# Altium PCB RT_SUPER_C.PCBdoc (part 3 of 3)
Units mil, origin at the board's own origin, x right, y up, seen from the top; angles counter-clockwise.
Board outline 1181.1 x 1181.1 mil, 4 copper layers (Top Layer, GND, PWR, Bottom Layer), stack 39.556 mil thick; 97 components, 119 nets, 508 pads, 144 vias.
Unrouted connection lines stored in the file: 163.
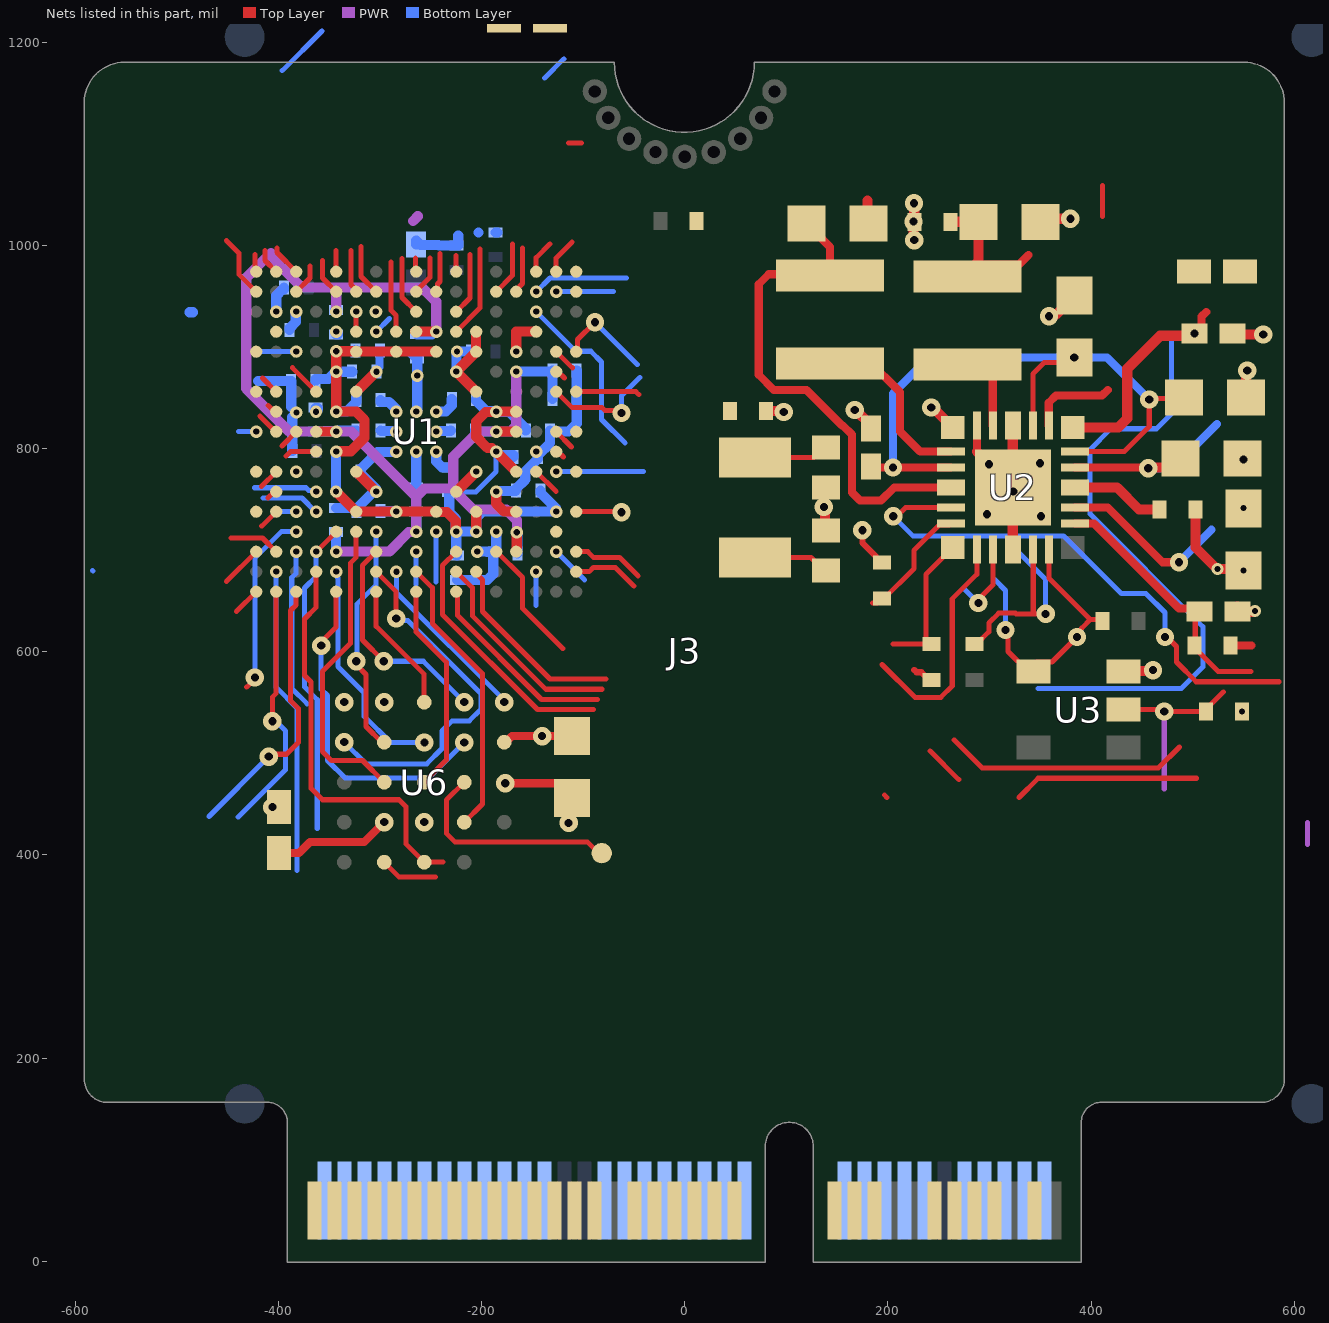
[diagram p4: the nets of this part, all layers, seen from the top]

## Via types
v1: diameter 12, hole 6, Top Layer to Bottom Layer, tented both sides, 83 vias
v2: diameter 18, hole 8, Top Layer to Bottom Layer, tented both sides, 61 vias

## Nets (pads, with @x,y where several pads share a name; then routed paths per layer and width w, separated by ;. In a path a pad name is that pad's centre, name@x,y a point inside that pad or via, vN(x,y) a via of type N, cw(c..) or ccw(c..) an arc to the next point about the centre after c; other vN are vias at no path point) (continued)
+3v3: C12.2 C13.2 C14.2 C15.2 C16.2 C17.2 C18.2 C20.2 C21.2 C22.2 C23.2 C24.2 C25.2 C42.1 C43.1 C?.1@793.44,405.6 C?.2@680.44,329.51 J1.1 J2.1 R3.2 R4.2 R8.2 R9.2 R12.2 R13.2 R14.2 R22.2 U1.E6 U1.E8 U1.E10 U1.F5 U1.H5 U1.H13 U1.H14 U1.K5 U1.K13 U1.L14 U1.M5 U1.N6 U1.N8 U1.N10 U1.N12 U1.N16 U1.P11 U1.P12 U6.B4 U6.D1 U6.E4 U?.8 | length 1373.8
  Top Layer w6: v2(174.91,719.45) 174.91,707.12 188.46,693.57 188.46,691.61 192.35,687.72 R3.2@194.31,687.72 ; 226,582 228.3,579.7 233.09,579.7 240.78,572.01 R4.2@242.74,572.01 ; R9.2@1063,261.72 1080.44,261.72 v2(1082.72,264)
  Top Layer w8: C43.1@-399.22,401.68 -379.75,401.68 -368.89,412.54 -315.35,412.54 v2(-295.72,432.17) ; U6.D1@-177.61,510.91 -175.83,510.91 -169.9,516.83 v2(-140.29,516.83) C42.1@-110.68,516.83
  Top Layer w10: v1(-343.22,757.54) -343.02,757.54 U1.M5@-342.96,757.48 U1.N6@-323.28,737.8 v1(-283.91,737.8) U1.N10@-244.54,737.8 -244.15,737.41 -234.1,737.41 -225.23,728.55 -225.23,718.5 v1(-224.85,718.11) ; v1(-342.96,796.85) -342.58,797.24 -328.52,797.24 -315.22,810.54 -315.22,828.17 -323.28,836.22 v1(-342.96,836.22) v1(-342.96,875.59) v1(-342.96,895.66) -323.66,895.66 U1.E6@-323.28,895.28 U1.E8@-283.91,895.28 U1.E10@-244.54,895.28 ; v1(-205.17,718.11) U1.N12@-205.17,737.8 ; U1.K13@-189.71,800.54 -194.17,800.54 -205.17,811.54 -205.17,826.59 -195.92,835.84 -185.86,835.84 v1(-185.48,836.22) U1.H14@-165.8,836.22 ; v1(-185.48,796.85) U1.L14@-165.8,777.17 ; R22.2@502.72,740 502.72,702.59 523.99,681.33 v1(524.45,681.33) ; v1@528.78,681.33 548.69,681.33 v1(550,680.02)
  Bottom Layer w5: C15.2@-231.74,757.29 -205.47,757.29 -185.48,777.28 v1(-185.48,796.85)
  Bottom Layer w10: C16.2@-363.22,866.54 -363.22,868.35 -363.14,868.43 -350.67,868.43 -343.5,875.59 v1(-342.96,875.59) ; v1(-343.22,757.54) C20.2@-343.22,777.54 -343.14,777.62 -343.14,796.67 v1(-342.96,796.85) ; v1(-342.96,836.22) -342.58,836.61 -332.34,836.61 -323.22,845.73 C21.2@-323.22,847.54 -323.22,849.35 C21.2@-323.3,849.43 ; v1(-342.96,895.66) -342.58,896.04 -323.81,896.04 -323.73,896.12 C17.2@-323.73,896.66 ; v1(-342.96,875.59) C13.2@-327.22,875.54 ; C24.2@-299.22,738.54 -299.22,738.25 -299.14,738.17 -284.28,738.17 v1(-283.91,737.8) ; C15.2@-231.74,757.29 -231.74,737.21 -225.23,730.71 -225.23,718.5 v1(-224.85,718.11) ; C12.2@-224.22,694.54 -224.85,695.17 v1(-224.85,718.11) ; C22.2@-205.22,848.54 -205.22,846.73 -195.1,836.61 -185.86,836.61 v1(-185.48,836.22) -185.1,835.84 -172.83,835.84 -156.34,819.35 C25.2@-156.34,817.54 ; v1(-185.48,796.85) -184.94,796.85 -181.51,793.43 -168.42,793.43 -168.34,793.35 C23.2@-168.34,791.54 ; C14.2@-141.98,758.47 -141.98,756.66 -126.81,741.48 -126.81,738.18 v1(-126.43,737.8) -199.31,737.8 -204.78,732.32 -204.78,718.5 v1(-205.17,718.11) v1(-224.85,718.11)
  other v1: 548.38,541.05
  other v2: -295.72,550.28
+5vUSB: D2.1 J3.19 U1.R16 U4.4 | length 225.2
  Top Layer w5: 196.5,459.04 199,456.54 ; 329.17,456.54 348.06,475.44 503.5,475.44
  Bottom Layer w5: v1(-126.43,698.43) -126.25,698.43 -98.46,670.64
+VBATT: C4.2 R6.2 U2.18 | length 235.7
  Top Layer w8: v2(501.78,913.11) 504.73,913.11 508.69,917.07 508.69,929.81 513.37,934.49 ; R6.2@537.04,606.01 557.97,606.01
  Top Layer w10: U2.18@382.03,820.67 426.89,820.67 435.66,829.43 435.66,878.58 468.07,910.99 499.65,910.99 v2(501.78,913.11)
+VBATT_BU: C3.2 R6.1 U2.13 | length 254
  Top Layer w5: C3.2@502.59,637.87 502.59,606.99 R6.1@501.6,606.01 501.6,604.04 525.22,580.42 557.56,580.42
  Top Layer w8: U2.13@384,726.18 402.9,726.18 486.41,642.66 497.73,642.66 499.84,640.55 C3.2@499.84,637.87
+VIN: D1.1 J3.2
+VREF: C6.2 J3.16 R21.2 U1.D2
ADC0_1: J3.22 U1.E3 | length 95.2
  Bottom Layer w5: -422.19,895.43 v1(-382.33,895.43) ; -396.17,1171.83 -357,1211
ADC0_3: U1.A2 | length 25.5
  Top Layer w5: -413.04,994.9 -413.04,985.04 U1.A2@-402.02,974.02
ADC0_4: U1.B5 | length 36.4
  Top Layer w5: -356.46,985.16 -356.46,967.83 U1.B5@-342.96,954.33
ADC0_8: J3.20 U1.E1 | length 1.9
  Top Layer w5: U1.E1@-423.04,896.62 U1.E1@-421.7,895.28
ADC0_12: J3.18 U1.B1 | length 62.5
  Top Layer w5: -451.06,1004.64 -438.81,992.39 -438.81,971.44 U1.B1@-421.7,954.33
DM_MCU: J3.21 U1.T17 U4.2 | length 66.2
  Top Layer w5: U1.T17@-106.74,678.74 -94,678.74 -89.85,682.88 -68.29,682.88 -49.87,664.47
DP_MCU: J3.23 U1.R17 U4.3 | length 70.9
  Top Layer w5: U1.R17@-106.74,698.43 -95.4,698.43 -89.85,692.88 -64.15,692.88 -45.73,674.47
FC0_CLK: J3.32 U1.G1
FC0_RXD: J3.36 U1.G4 | length 33.2
  Top Layer w5: -386.15,879.41 U1.G4@-362.65,855.91
FC0_SSEL0: J3.38 U1.H2 | length 10.6
  Top Layer w5: -410.1,842.41 -403.91,836.22 U1.H2@-402.02,836.22
FC0_SSEL1: U1.J1 | length 17.5
  Bottom Layer w5: -439.22,816.54 v1(-421.7,816.54)
FC0_TXD: J3.34 U1.G2 | length 19.1
  Top Layer w5: -415.52,869.41 U1.G2@-402.02,855.91
FC1_CLK: J3.40 U1.J2 | length 22.2
  Top Layer w5: -417.88,831.81 -402.61,816.54 U1.J2@-402.02,816.54
FC1_DAT: J3.44 U1.L3 | length 0.7
  Bottom Layer w5: -583,680 -582.52,679.52
  other v1: -382.33,777.17
FC1_SSEL0: J3.46 U1.J3 | length 19.8
  Top Layer w5: -396.33,802.54 U1.J3@-382.33,816.54
FC1_SSEL1: U1.L1
FC1_TXD: J3.42 U1.K4 | length 31.3
  Top Layer w5: -392.19,792.54 -387.87,796.85 U1.K4@-362.65,796.85
FC2_CLK: J3.70 U1.A3 | length 31.1
  Top Layer w5: -401.24,997.24 -401.24,992.93 U1.A3@-382.33,974.02
FC2_SDA: J3.74 U1.D6 | length 48.2
  Top Layer w5: U1.D6@-323.28,914.96 v1(-323.28,934.65)
  Bottom Layer w5: -137.94,1164.49 -118.96,1183.48 ; 490.84,1353.84 492,1355
FC2_SSEL0: U1.D7 | length 18.4
  Bottom Layer w5: v1(-303.59,914.96) -290.56,928
FC2_SSEL1: U1.B7 | length 50.7
  Top Layer w5: -318.52,998.83 -318.52,969.27 U1.B7@-303.59,954.33
FC2_WS: J3.72 U1.A5 | length 21
  Top Layer w5: U1.A5@-342.96,974.02 -342.96,994.98
FC3_CLK: U1.C7 | length 11.9
  Bottom Layer w5: v1(-304.06,934.65) v1@-303.59,935.11 ; -165.95,1247.05 -158,1255
FC3_SDA: J3.68 U1.C9 | length 58
  Top Layer w5: -278.22,986.81 -278.22,948.65 U1.C9@-264.22,934.65
FC3_SSEL0: U1.B9 | length 38.9
  Top Layer w5: U1.B9@-264.22,954.33 -264.22,954.93 -250.72,968.43 -250.72,987.59
FC3_SSEL1: U1.A9 | length 13.7
  Top Layer w5: -264.79,987.52 -264.79,974.58 U1.A9@-264.22,974.02
FC3_WS: U1.D8 | length 70.3
  Top Layer w5: -288.83,983.27 -288.83,935.68 -283.91,930.76 U1.D8@-283.91,914.96
FC4_CLK: J3.60 U1.D11 | length 93.3
  Top Layer w5: U1.D11@-224.85,914.96 -201.35,938.46 -201.35,996.17
  PWR w5: 239.6,1255 242,1255
FC4_SDA: J3.64 U1.C11 | length 61.6
  Top Layer w5: U1.C11@-224.85,934.65 -211.35,948.15 -211.35,990.65
FC4_SSEL0: U1.A11 | length 16
  Top Layer w5: U1.A11@-224.85,974.02 -224.85,990.01
FC4_SSEL1: U1.E17 | length 730.4
  Top Layer w5: U1.E17@-106.74,895.28 -105.4,896.62 -105.4,907.14 v2(-88.29,924.25) ; 411.27,1028.13 411.27,1058.91
  Bottom Layer w5: v2(-88.29,924.25) -46.64,882.6 ; 347.7,563.92 488.93,563.92 510.01,585 510.01,624.57 399.17,735.41 399.17,799.06 419.49,819.39 464.39,819.39 479,834 479,912.81
FC4_WS: J3.62 U1.B10 | length 39
  Top Layer w5: U1.B10@-244.54,954.33 -243.2,955.67 -243.2,961.81 -240.72,964.28 -240.72,991.74
FC5_SCK: J3.52 U1.G16 | length 115.4
  Top Layer w5: U1.G16@-126.43,855.91 -110.68,840.16 -81.22,840.16 -78.54,837.48 -64.71,837.48 v2(-62.22,835)
  Bottom Layer w5: v2(-62.22,835) -62.1,835.12 -62.1,851.9 -44.02,869.98
FC5_SDA: J3.56 J3.66 U1.J16 | length 21.2
  Top Layer w5: U1.J16@-126.43,816.54 -111.43,801.54
FC5_SSEL0: J3.58 U1.J17
FC5_WS: J3.54 U1.G17 | length 62.9
  Top Layer w5: U1.G17@-106.74,855.91 -48.11,855.91 -45.11,852.91
FLEXSPI0A_D0: U1.T5 U6.D3 U?.5 | length 224
  Top Layer w5: U6.D3@-256.35,510.91 -256.35,510.66 v2(-256.22,510.54)
  Bottom Layer w5: v1(-342.96,678.74) -341.62,677.4 -341.62,672.71 -341.22,672.31 -341.22,585.21 -315.36,559.34 -315.36,536.47 -289.42,510.54 v2(-256.22,510.54)
FLEXSPI0A_D1: U1.U5 U6.D2 U?.2 | length 331.5
  Top Layer w5: v2(-357.72,605.91) -357.72,609.43 -342.96,624.19 U1.U5@-342.96,659.06 ; v2(-216.98,510.54) U6.D2@-216.98,510.91
  Bottom Layer w5: v2(-357.72,605.91) -357.72,563.03 -351.59,556.89 -351.59,492.95 -334.18,475.54 -251.98,475.54 v2(-216.98,510.54)
FLEXSPI0A_D2: U1.P6 U6.C4 U?.3 | length 303.5
  Top Layer w5: U1.P6@-323.28,718.11 -323.28,692.88 -329.02,687.14 -329.02,608.07 -356.46,580.63 -356.46,501.57 -347.77,492.89 -317.06,492.89 U6.C4@-295.72,471.54
FLEXSPI0A_D3: U1.P7 U6.D4 U?.7 | length 228.2
  Top Layer w5: v2(-323.22,590.54) -323.22,587.02 -313.66,577.46 -313.66,526.41 -298.16,510.91 U6.D4@-295.72,510.91
  Bottom Layer w5: v2(-323.22,590.54) -322.65,591.11 -322.65,646.72 -303.59,665.78 v1(-303.59,718.11)
FLEXSPI0A_D4: U1.T7 U6.D5 | length 359.4
  Top Layer w5: U1.T7@-303.59,678.74 -283.91,659.06 v2(-283.91,632.54)
  Bottom Layer w5: v2(-335.09,510.91) -313.73,489.55 -253.87,489.55 -238.84,504.58 -238.84,521.86 -228.74,531.96 -211.96,531.96 -200.48,543.44 -200.48,558.55 -272.52,630.59 -281.96,630.59 v2(-283.91,632.54)
FLEXSPI0A_D5: U1.U7 U6.E3 | length 128.3
  Top Layer w5: U1.U7@-303.59,659.06 -303.59,625.01 -256.35,577.77 U6.E3@-256.35,550.28
FLEXSPI0A_D6: U1.R7 U6.E2 | length 218
  Top Layer w5: U1.R7@-303.59,698.43 -317.09,684.93 -317.09,611.41 v2(-296.22,590.54)
  Bottom Layer w5: v2(-296.22,590.54) -257.24,590.54 v2(-216.98,550.28)
FLEXSPI0A_D7: U1.T8 U6.E1 | length 174.2
  Top Layer w5: U1.T8@-283.91,676.85 U1.T8@-283.91,678.74
  Bottom Layer w5: v1(-283.78,678.61) -283.78,658.29 -177.61,552.13 v2(-177.61,550.28)
FLEXSPI0A_DQS: U1.U9 U6.C3 | length 208.9
  Top Layer w5: U1.U9@-264.22,659.06 -264.22,619.39 -234.54,589.7 -234.54,493.35 U6.C3@-256.35,471.54
FLEXSPI0A_SCK: U1.T9 U6.B2 U?.6 | length 281.1
  Top Layer w5: U1.T9@-264.22,678.74 -248.35,662.87 -248.35,627.74 -198.98,578.37 -198.98,450.16 U6.B2@-216.98,432.17
FLEXSPI0A_SS0_N: R9.1 U1.T4 U6.A3 | length 402.1
  Top Layer w5: U1.T4@-362.65,678.74 -362.65,643.75 -374.22,632.17 -374.22,576.59 -367.72,570.09 -367.72,465.51 -356.46,454.24 -281.17,454.24 -274.46,447.53 -274.46,410.92 U6.A3@-256.35,392.8 -237.88,392.8
FLEXSPI0A_SS1_N: U1.U3 U?.1 | length 272.1
  Top Layer w5: v2(-409.34,496.7) -407.02,499.02 -391.88,499.02 -380.11,510.79 -380.11,543.84 -387.87,551.6 -387.87,640.44 -382.33,645.99 U1.U3@-382.33,659.06
  Bottom Layer w5: -468.22,437.82 v2(-409.34,496.7)
GND: C1.1 C2.2 C3.1 C4.1 C5.2 C6.1 C7.1 C8.2 C9.1 C10.1 C11.2 C12.1 C13.1 C14.1 C15.1 C16.1 C17.1 C18.1 C19.2 C20.1 C21.1 C22.1 C23.1 C24.1 C25.1 C26.1 C27.1 C28.1 C29.1 C30.1 C31.1 C32.1 C33.1 C34.1 C35.1 C36.1 C37.1 C38.1 C39.1 C40.1 C41.1 C42.2 C43.2 C44.2 C45.2 C?.1@680.44,398.41 C?.2@793.44,360.32 D3.C D4.C D5.C J1.5 J2.3 J2.5 J2.9 J3.3 J3.4 J3.14 R1.1 R15.1 R17.1 R18.1 U1.C2 U1.C3 U1.D5 U1.D12 U1.D15 U1.E12 U1.E14 U1.F7 U1.F11 U1.G6 U1.G12 U1.H8 U1.H9 U1.H10 U1.J8 U1.J10 U1.K8 U1.K9 U1.K10 U1.L6 U1.L12 U1.M7 U1.M11 U1.M13 U1.N14 U1.P13 U2.9 U2.21 U2.23 U2.24 U2.25 U3.3 U4.1 U6.B3 U6.C1 U6.E5 U?.4 | length 1742.5
  Top Layer w8: U6.C1@-177.61,471.54 v2(-176.58,470.51) -124.39,470.51 -110.68,456.79 C42.2@-110.68,455.81 -112.8,453.68 -112.8,433.02 v2(-114.22,431.54) v2(-114.22,431.54) ; U2.25@287.61,796.98 U2.23@287.61,822.57
  Top Layer w10: U1.G6@-323.28,855.91 U1.F7@-303.65,875.54 ; U1.L6@-322.73,777.17 U1.L6@-323.28,777.17 v1(-303.59,757.48) ; U1.F7@-303.59,875.59 v1(-303.22,875.54) v1(-303.22,875.54) ; U1.M11@-224.85,757.48 v1(-205.17,777.17) ; U1.G12@-205.17,855.91 v1(-224.85,875.59) U1.E12@-205.17,895.28 -205.22,895.33 -205.22,914.91 U1.D12@-205.17,914.96 ; v1(-185.48,757.48) -185.48,745.67 -177.61,737.8 U1.N14@-165.8,737.8 ; v1(-165.8,895.28) -165.8,914.96 U1.D15@-146.11,914.96 ; R1.1@80.23,836.78 96.65,836.78 v2(97.51,835.92) ; C44.2@139,719.45 138.02,720.43 138.02,741.5 v2(137.03,742.48) 137.03,759.67 C45.2@139,761.64 ; v2(167.4,837.76) 168.42,837.76 183.47,822.72 C8.2@183.47,819.76 ; 180,1043.9 180,1022.56 C9.1@181.04,1021.53 C9.1@182.02,1020.54 ; v2(242.74,840.26) 244.33,840.26 U2.24@263.92,820.67 ; U2.25@287.61,796.98 U2.25@322.98,761.61 ; U2.9@322.98,700.59 U2.25@322.98,758.06 ; U2.21@322.98,822.64 U2.25@322.98,761.61 ; v2(323.45,757.58) U2.25@322.98,758.06 ; C7.1@350.09,1023.11 353.04,1026.06 v2(379.62,1026.06) ; v2(358.54,930.17) 360.07,931.7 365.54,931.7 383.48,949.64 C5.2@383.48,950.62 ; U3.3@431.72,580.42 432.43,581.13 460.26,581.13 v2(460.96,581.83) ; C4.1@543.11,913.11 544.11,912.11 v2(569.52,912.11) ; C3.1@543.93,639.35 C3.1@547.86,639.35 ; C3.1@543.93,644.19 547.86,640.26 C3.1@547.86,639.35 ; C1.1@548.99,790.11 550,789.1 v2(550,789) ; C18.1@550,741.04 v1(550,741.53) ; C18.1@550.24,741.28 C18.1@550.98,742.02 ; C2.2@552.4,850.11 552.4,875.31 v2(553.77,876.68) ; v1(561.22,640.12) 560.46,639.35 C3.1@547.86,639.35 ; U2.25@322.98,758.06 U2.25@322.98,761.61
  Bottom Layer w5: C38.1@-394.33,956.3 C38.1@-394.33,956.46
  Bottom Layer w8: v1(-303.22,875.54) -303.22,877.51 -300.53,880.19 -300.53,894.74 -299.61,895.66 -272.31,895.66 -265.19,888.54 C34.1@-263.22,888.54
  Bottom Layer w10: -487.44,934.09 -484.19,934.09 ; -419.88,866.54 C16.1@-387.22,866.54 -387.22,841.08 ; v1(-402.02,934.65) -402.02,950.44 -396.08,956.38 -394.41,956.38 -394.33,956.46 C38.1@-394.33,958.27 ; C39.1@-388.81,916.54 -388.81,918.35 -382.71,924.45 -382.71,934.27 v1(-382.33,934.65) ; C40.1@-386.3,797.4 -386.22,797.48 C40.1@-386.22,797.69 -386.22,830.99 -382.22,835 v1(-382.22,835.54) ; C30.1@-363.14,839.54 C30.1@-361.17,839.54 ; C33.1@-343.23,912.25 C33.1@-341.42,912.25 ; C32.1@-341.41,741.54 C32.1@-343.22,741.54 -343.14,741.46 -324.33,741.46 C24.1@-323.22,740.35 ; C24.1@-323.22,738.54 C24.1@-323.22,740.35 ; C29.1@-299.22,817.54 -298.72,817.04 -284.41,817.04 v1(-283.91,816.54) ; C21.1@-299.22,847.54 -299.22,845.73 -299.14,845.65 -290.84,845.65 -284.29,839.09 -284.29,836.61 v1(-283.91,836.22) ; v1(-283.91,796.85) -284.29,796.47 -302.1,796.47 -319.22,779.35 C20.1@-319.22,777.54 -319.22,775.73 -303.97,760.48 -303.97,757.87 v1(-303.59,757.48) -303.97,757.1 -306.61,757.1 -315.36,748.36 -315.36,748.21 C24.1@-323.22,740.35 ; C27.1@-264.22,761.8 v1(-264.22,796.85) ; v1(-264.22,836.22) -264.22,836.76 -263.24,837.75 v1(-263.24,871.66) ; C10.1@-264.22,1000.59 -264.22,1004.53 -259.8,1000.11 -242.22,1000.11 -241.91,999.8 -225.27,999.8 -225.19,999.72 C36.1@-224.65,999.72 ; v1(-263.24,871.66) C34.1@-263.22,888.54 ; v1(-244.54,796.85) -244.54,787.15 -238.68,781.29 C15.1@-231.74,781.29 ; v1(-244.54,816.54) -244.04,817.04 -230.72,817.04 C28.1@-230.22,817.54 ; v1(-244.54,836.22) -244.29,836.46 -235.08,836.46 -229.22,842.32 C22.1@-229.22,848.54 ; v1@-225.27,876.55 -224.85,876.13 v1(-224.85,875.59) -224.54,875.91 -224.54,895.22 v1(-224.22,895.54) C41.1@-210.22,895.54 ; C12.1@-224.22,670.54 -194.29,670.54 -188.43,676.4 -188.43,694.46 -188.62,694.65 C31.1@-188.62,696.46 C31.1@-188.62,698.27 ; C36.1@-222.76,999.8 -222.76,1009.58 ; v1(-204.18,698.43) -194.48,698.43 -194.4,698.35 -188.7,698.35 C31.1@-188.62,698.27 ; C37.1@-186.22,1012.59 C37.1@-184.41,1012.59 ; v1(-185.48,718.11) -185.48,701.41 C31.1@-188.62,698.27 ; v1(-185.48,757.48) -184.99,757.97 -166.48,757.97 C14.1@-165.98,758.47 -165.98,760.28 -156.91,769.36 -156.91,777.02 -153.42,780.51 -153.42,780.65 -144.34,789.73 C23.1@-144.34,791.54 C23.1@-144.34,793.35 ; v1(-146.11,796.85) -146.11,795.12 C23.1@-144.34,793.35 ; C25.1@-132.42,817.46 C25.1@-132.42,816.7 ; C26.1@-105.83,876.54 C26.1@-106.22,876.54 C35.1@-106.22,848.54 -106.22,824.54 -114.22,816.54 -132.26,816.54 C25.1@-132.42,816.7 ; C23.1@-144.34,793.35 -132.42,805.27 C25.1@-132.42,816.7
  other v1: -362.82,836.17 -342.96,914.96
  other v2: -256.35,432.17 -405.81,446.96 -335.09,550.28 350.66,733.34 297.51,735.31 299.48,784.52 349.68,785.51
HS_SPI_MISO: J3.51 U1.M2 | length 10.5
  Top Layer w5: -410.01,751.39 -403.91,757.48 U1.M2@-402.02,757.48
HS_SPI_MOSI: J3.49 U1.N1 | length 1.8
  Top Layer w5: U1.N1@-422.95,736.55 U1.N1@-421.7,737.8
HS_SPI_SCK: J3.47 U1.L2 | length 20.7
  Top Layer w5: -416.63,762.56 U1.L2@-402.02,777.17
HS_SPI_SSEL0: J3.53 U1.N2 | length 207.9
  Top Layer w5: -2017,476 -1903.1,476 -1880.69,498.41 -1880.69,540.56 ; -416.28,723.54 U1.N2@-402.02,737.8
I3C0_PUR: R16.1 U1.B6 | length 42.5
  Top Layer w5: -328.52,994.69 -328.52,961.47 -323.28,956.23 U1.B6@-323.28,954.33
I3C0_SCL: U1.N17 | length 43.5
  Top Layer w5: U1.N17@-106.74,737.8 v2@-63.2,737.8
  other v2: -62.22,737.21
I3C0_SDA: R16.2 U1.P16 | length 2.6
  Top Layer w5: U1.P16@-126.43,718.11 U1.P16@-126,718.54 ; R16.2@988.57,493.03 R16.2@988.57,495
ISP0: J3.71 R12.1 R15.2 U1.N3 | length 173.9
  Top Layer w5: -1917,426.14 -1862.72,480.42 R12.1@-1862.72,482.39 R15.2@-1862.72,517.5 -1862.72,519.46 -1858.33,523.85 -1856.32,523.85 -1835.66,544.51
  Bottom Layer w5: -402.96,737.8 v1(-382.33,737.8)
ISP1: J3.73 R13.1 R17.2 U1.M4 | length 269.4
  Top Layer w5: -2017,376 -1892.23,376 -1862.72,405.51 R13.1@-1862.72,407.48 v2(-1862.72,426.34) R17.2@-1862.72,446
  Bottom Layer w5: -423.46,761.3 -372.6,761.3 -370.12,758.82 -363.99,758.82 v1(-362.65,757.48)
ISP2: J3.75 R14.1 R18.2 U1.N4 | length 154.7
  Top Layer w5: -1917,326 -1875.75,326 -1862.72,339.03 R14.1@-1862.72,341 v2(-1862.72,358.07) R18.2@-1862.72,376
  Bottom Layer w5: -415.15,751.3 -376.74,751.3 -363.24,737.8 v1(-362.65,737.8)
MCLK: U1.K16 | length 251.1
  Top Layer w5: U1.K16@-126.43,796.85 -124.53,796.85 -119.22,791.54 ; 265.35,512.99 292.9,485.44 466.22,485.44 487.04,506.26
NetC1_2: C1.2 D1.2 D2.2 U2.16 | length 303
  Top Layer w8: D2.2@-1138.37,1399.21 -1125.57,1399.21 -1103.25,1421.54 -1103.25,1431.2 v2(-1101.33,1433.11) -1103.25,1435.03 -1103.25,1443.8 -1123.45,1464 D1.2@-1136.24,1464 ; U2.16@384.09,781.21 v2@455.67,781.21
  Top Layer w10: v2@455.67,781.21 v2(456.33,780.55) ; v2@456.33,781.3 479.15,781.3 C1.2@487.96,790.11
  Bottom Layer w8: v2(456.33,780.55) 480.55,780.55 524,824
NetC2_1: C2.1 C5.1 C8.1 U2.2 U2.17 U2.20 | length 677.6
  Top Layer w5: U2.20@342.66,822.64 342.66,873.25 353.96,884.55 378.43,884.55 v2(383.48,889.6) ; U2.17@384,797.05 432.8,797.05 457.31,821.56 v2(457.31,848.14) ; v2@458.3,849.12 490.38,849.12 C2.1@491.37,850.11
  Top Layer w8: C8.1@183.47,782.36 184.53,781.3 v2(205,781.3) U2.2@261.95,781.3
  Bottom Layer w8: v2(205,781.3) 205,853.98 240.62,889.6 415.85,889.6 v2(457.31,848.14)
NetC7_2: C7.2 L2.2 R7.1 U2.19 | length 241.2
  Top Layer w5: C7.2@273.99,1023.11 C7.2@289.07,1023.11
  Top Layer w8: L2.2@279.32,969.48 L2.2@278.48,969.48 290.22,981.23 329.16,981.23 338.47,990.54 ; U2.19@358.41,822.64 358.41,845.03 365.46,852.07 410.81,852.07 416.45,857.71
  Top Layer w10: R7.1@261.72,1023.11 C7.2@273.99,1023.11 ; L2.2@273.99,968.91 L2.2@273.99,973.48 ; L2.2@278.48,973.48 289.07,984.07 C7.2@289.07,1023.11
NetC9_2: C9.2 L3.2 R10.1 U2.3 | length 500.6
  Top Layer w8: C9.2@121,1021.53 134.71,1007.81 134.71,1006.83 143.2,998.34 143.2,973.48 141.14,971.42 82.74,971.42 72.91,961.59 72.91,872.53 87.74,857.71 119.99,857.71 154.98,822.72 155.61,822.72 164.63,813.71 164.63,756.69 172.55,748.76 193.39,748.76 206.24,761.61 U2.3@261.95,761.61
NetC11_1: C11.1 U1.B14 Y1.3 | length 45.4
  Top Layer w5: U1.B14@-165.8,954.33 -165.8,956.23 -159.61,962.41 -159.61,997.14
NetC19_1: C19.1 U1.B13 Y1.1 | length 113
  Top Layer w5: -429.89,1355.3 -399.59,1325 -399.59,1308.38 ; U1.B13@-185.48,954.33 -169.61,970.2 -169.61,1001.29
NetC44_1: C44.1 U1.B17 X1.2 | length 90.6
  Top Layer w5: X1.2@53.59,692.71 X1.2@69.34,692.71 124.4,692.71 137.03,680.08 C44.1@139,680.08
NetC45_1: C45.1 U1.A17 X1.1 | length 89.5
  Top Layer w5: X1.1@53.59,791.14 X1.1@69.34,791.14 127.16,791.14 137.03,801.01 C45.1@139,801.01
NetD3_A: D3.A R19.1 | length 70.4
  Top Layer w6: R19.1@-1617,1111 D3.A@-1617,1181.36
NetD4_A: D4.A R20.1 | length 68.8
  Top Layer w6: R20.1@-1557.27,1111.32 D4.A@-1557.27,1180.16
NetD5_A: D5.A R23.1
NetL2_1: L2.1 U2.22 | length 82.2
  Top Layer w8: L2.1@278.48,886.87 291.54,886.87 303.29,875.12 U2.22@303.29,822.64
NetL3_1: L3.1 U2.1 | length 178.6
  Top Layer w8: L3.1@143.2,886.87 180.6,886.87 212.09,855.38 212.09,816.78 231.83,797.05 U2.1@261.95,797.05
NetR1_2: R1.2 U1.A16 | length 48.2
  Top Layer w5: U1.A16@-126.43,974.02 -126.43,987.48 -110.68,1003.22 ; -114.25,1100.67 -101.81,1100.67
NetR11_2: R11.2 U6.A4 | length 56.8
  Top Layer w5: U6.A4@-295.72,392.8 -280.93,378.01 -245.04,378.01
NetR22_1: R22.1 U2.15 | length 92.2
  Top Layer w10: U2.15@384,761.61 425.62,761.61 447.23,740 R22.1@467.28,740
NetTP1_1: TP1.1 U6.C2 | length 218.7
  Top Layer w5: U6.C2@-216.98,471.54 -234.54,453.98 -234.54,421.16 -225.92,412.54 -95.47,412.54 -84.61,401.68 TP1.1@-81.57,401.68
PDM_CLK01: J3.55 U1.R1 | length 41.5
  Top Layer w5: -451.06,669.07 U1.R1@-421.7,698.43
PDM_CLK23: J3.59 U1.U1 | length 27.4
  Top Layer w5: -441.06,639.7 U1.U1@-421.7,659.06
PDM_CLK45: J3.63 U1.R2 | length 50.3
  Top Layer w5: -446.7,711.93 -415.52,711.93 U1.R2@-402.02,698.43
PDM_CLK67: J3.67 U1.T2 | length 302.4
  Bottom Layer w5: v1(-402.02,678.74) -402.02,564.89 -381.59,544.46 -381.59,384.79
PDM_DATA01: J3.57 U1.U2 | length 250.1
  Top Layer w5: v2(-405.81,531.54) -405.81,555.15 -402.02,558.94 U1.U2@-402.02,659.06
  Bottom Layer w5: -439.35,437.19 -392.84,483.69 -392.84,522.09 -402.29,531.54 v2(-405.81,531.54)
PDM_DATA23: J3.61 U1.R3 | length 157.9
  Bottom Layer w5: v1(-382.33,698.43) -382.33,677.14 -386.68,672.78 -386.68,563.7 -371.59,548.61
PDM_DATA45: J3.65 U1.P3 | length 181.8
  Top Layer w5: -431.06,565.1 -423.04,573.12 v2(-423.04,574.53)
  Bottom Layer w5: v2(-423.04,574.53) -423.04,692.01 -396.94,718.11 v1(-382.33,718.11)
PDM_DATA67: J3.69 U1.P5 | length 310.3
  Top Layer w5: v1(-362.65,698.43) U1.P5@-342.96,718.11
  Bottom Layer w5: v1(-362.65,698.43) -362.65,674.33 -374.22,662.75 -374.22,565.39 -361.59,552.75 -361.59,425.97
PIO0_19: R19.2 U1.A1 | length 17.3
  Top Layer w5: -423.04,990.76 -423.04,975.36 U1.A1@-421.7,974.02
PMIC_INTB: R2.1 U1.A15 U2.10 | length 259.9
  Top Layer w5: U1.A15@-146.11,974.02 -146.11,987.8 -132.52,1001.39 ; R2.1@285.38,607.45 287.35,607.45 299.38,619.48 299.38,628.2 309.04,637.87 325.78,637.87 326.4,637.25 343.14,637.25 ; U2.10@342.66,700.59 343.14,700.11 343.14,637.25 ; v2(355.31,637.25) 343.14,637.25
  Bottom Layer w5: 325.89,700.48 355.31,671.06 v2(355.31,637.25)
PMIC_MODE0: U1.C15 U2.7 | length 405.9
  Top Layer w5: 194.31,587.41 226.7,555.03 252.11,555.03 263.38,566.29 263.38,637.18 263.38,652.02 287.54,676.19 U2.7@287.54,700.59
  Bottom Layer w5: v1@-146.23,934.76 v1(-146.11,934.65) -107.12,895.66 -92.34,895.66 -81.85,885.18 -81.85,828.53 -58.59,805.27
PMIC_MODE1: U1.B16 U2.8 | length 133.8
  Top Layer w5: v2(289.07,647.87) 289.07,651.29 303.29,665.51 U2.8@303.29,700.59
  Bottom Layer w5: v1(-126.43,954.33) -69.86,954.33 ; 275.88,661.06 v2(289.07,647.87)
PMIC_ON: U2.4 | length 530.5
  Top Layer w5: v2(205.34,733.26) 208.86,733.26 217.52,741.93 U2.4@261.95,741.93 ; v2(472.8,614.34) 474.75,614.34 484.07,605.02 484.07,589.87 503.52,570.42 585.19,570.42
  Bottom Layer w5: v2(205.34,733.26) 224.6,714 372.97,714 429.89,657.08 454.17,657.08 472.8,638.44 v2(472.8,614.34)
PMIC_RESETN: R5.1 U1.B15 U2.11 U3.4 | length 377.9
  Top Layer w5: v2(315.88,621.37) 318.37,618.88 318.37,600.27 338.22,580.42 U3.4@343.14,580.42 ; U3.4@343.93,587.41 346.25,589.73 361.49,589.73 v2(386.1,614.34) ; U2.11@358.41,700.59 358.41,672.49 399.3,631.6 ; v2@386.45,614.34 386.45,618.2 390.73,622.49 390.73,623.03 399.3,631.6 ; R5.1@411.25,630.41 410.06,631.6 399.3,631.6
  Bottom Layer w5: v1(-146.11,954.33) -132.61,967.83 -57.31,967.83 ; 305.11,671.06 315.88,660.29 v2(315.88,621.37)
PMIC_SCL: R3.1 U1.E16 U2.5 | length 141.5
  Top Layer w5: U1.E16@-126.43,895.28 -110.56,879.41 ; 185.05,647.89 189.93,647.89 R3.1@194.31,652.28 ; R3.1@195.5,651.5 225.67,681.67 225.67,699.74 250.67,724.74 260.52,724.74 U2.5@261.95,726.18
PMIC_SDA: R4.1 U1.F16 U2.6 | length 155.9
  Top Layer w5: U1.F16@-126.43,875.59 -124.53,875.59 -118.35,869.41 ; 205.34,607.45 R4.1@241.85,607.45 ; R4.1@242.74,607.45 R4.1@241.85,607.45 ; U2.6@263.92,702.56 237.46,676.1 237.46,611.84 R4.1@241.85,607.45
RED_LED: R20.2 U1.B3 | length 30.9
  Top Layer w5: U1.B3@-382.33,954.33 -368.83,967.83 -368.83,979.61
RST_3V3: J1.3 J2.10 J3.13 R8.1 R11.1 U3.2 | length 206.7
  Top Layer w5: U3.2@431.72,543.02 470.11,543.02 v2(472.08,541.05) R8.1@512.95,541.05 512.95,543.02 530.35,560.42
  PWR w5: 472.08,464.92 v2(472.08,541.05) ; 613,410 613,432
SD_CLK: J3.33 U1.P10 | length 49.7
  Bottom Layer w5: -244.54,668.43 v1(-244.54,718.11)
SD_CMD: J3.35 U1.R9 | length 32.2
  Bottom Layer w5: -264.22,666.2 v1(-264.22,698.43)
SD_D0: J3.37 U1.R11 | length 254.8
  Top Layer w5: U1.R11@-224.85,698.43 -238.35,684.93 -238.35,636.44 -144.95,543.03 -89.85,543.03
SD_D1: J3.39 U1.T11 | length 207.3
  Top Layer w5: U1.T11@-224.85,678.74 -208.98,662.87 -208.98,635.35 -136.66,563.03 -81.57,563.03
SD_D2: J3.41 U1.U11 | length 195.9
  Top Layer w5: U1.U11@-224.85,659.06 -223.51,657.72 -223.51,635.74 -140.81,553.03 -85.71,553.03
SD_D3: J3.43 U1.T12 | length 190.9
  Top Layer w5: U1.T12@-205.17,678.74 -205.17,676.85 -198.98,670.66 -198.98,639.49 -132.52,573.03 -77.43,573.03
SD_DETECT_N: U1.R13 | length 122.9
  Top Layer w5: U1.R13@-185.48,698.43 -184.89,698.43 -159.61,673.15 -159.61,642.63 -120.01,603.03
SD_RESET_N: U1.T15 | length 33.2
  Bottom Layer w5: -146.23,645.54 v1(-146.23,678.74)
SWCLK: J1.4 J2.4 J3.9 U1.L17
SWIO: J1.2 J2.2 J3.7 U1.L15 | length 67.8
  Top Layer w5: U1.L15@-146.11,777.17 -126.48,757.54 ; 241.57,502.37 269.9,474.05
SWO: J1.6 J2.6 J3.11 U1.L16 | length 85.7
  Bottom Layer w5: v1(-126.43,777.17) -40.68,777.17
TEMP_SENSE: U2.14 | length 170.1
  Top Layer w8: U2.14@384,741.93 416.45,741.93 470.36,688.02 v2(486.52,688.02)
  Bottom Layer w8: v2(486.52,688.02) 518.5,720
VDD_CORE: C26.2 C27.2 C28.2 C29.2 C30.2 C31.2 C32.2 C33.2 C34.2 C35.2 R7.2 U1.C5 U1.D9 U1.F14 U1.J4 U1.J14 U1.P9 U1.R5 U1.R14 | length 1331.2
  Top Layer w10: U1.J4@-362.65,816.54 v1(-342.96,816.54) ; U1.D9@-265.3,914.96 U1.D9@-264.22,914.96 v1(-244.54,914.96) ; v1(-185.48,816.54) -167.87,816.54 -167.56,816.86 U1.J14@-167.56,817.22 ; U1.R14@-165.8,698.43 -165.41,698.81 -165.41,700.22 -165.22,700.42 v1(-165.22,717.54) ; R7.2@224.31,1023.11 R7.2@224.31,1025.08 ; v2(225.28,1023.26) 225.28,1005.03 v2(225.98,1005.03) ; v2@225.67,1038.35 225.98,1038.04 R7.2@225.98,1023.93 ; R7.2@225.98,1023.32 R7.2@225.98,1023.93 ; R7.2@226,1023.34 226.28,1023.62 R7.2@225.98,1023.93
  PWR w10: v1(-342.96,698.43) -290.8,698.43 -271.49,717.73 -264.6,717.73 v1(-264.22,718.11) -264.22,752.56 ; v1(-342.96,934.65) -342.96,958.27 ; -267.24,1023.88 -262.63,1028.49 ; v1(-244.54,914.96) -244.54,944.49 -258.32,958.27 -342.96,958.27 ; v1(-165.8,875.59) -165.8,822.4 -171.65,816.54 v1(-185.48,816.54) -203.2,816.54 -227.8,791.93 -227.8,761.42 -228.79,760.44 ; v1(-165.22,717.54) -165.16,717.59 -165.16,729.29 -175.64,739.77 -208.12,739.77 -228.79,760.44 ; -342.96,958.27 -376.64,958.27 -403.22,984.86 -403.22,988.41 -407.24,992.42 -431.54,968.11 -431.54,858.86 -389.22,816.54 v1(-342.96,816.54) -328.2,816.54 -264.22,752.56 ; -264.22,752.56 -256.35,760.44 -228.79,760.44
  Bottom Layer w10: C30.2@-363.14,816.54 -363.06,816.62 -355.09,816.62 -354.79,816.92 -343.34,816.92 v1(-342.96,816.54) -341.88,816.54 -340.88,817.54 C29.2@-323.22,817.54 ; C33.2@-343.94,936.17 -342.96,935.19 v1(-342.96,934.65) ; C33.2@-343.51,936.33 -343.43,936.25 C33.2@-343.23,936.25 ; C32.2@-343.22,717.54 -343.31,717.46 -343.09,717.46 -343.09,698.56 v1(-342.96,698.43) v1@-342.96,698.97 ; v1(-264.22,718.11) C27.2@-264.22,737.8 ; C34.2@-263.22,912.54 -263.14,912.46 -248.93,912.46 -246.81,914.58 -244.92,914.58 v1(-244.54,914.96) ; C28.2@-206.22,817.54 -205.22,816.54 v1(-185.48,816.54) ; v1(-165.8,875.59) -131.17,875.59 C26.2@-130.22,876.54 C35.2@-130.22,848.54 ; v1(-165.22,717.54) -165.22,717 -164.62,716.4 C31.2@-164.62,696.46
  other v2: 225.67,1041.35
VDDIO_0: J3.6
VDDIO_1: J3.8
VDDIO_2: J3.10
pads on no net: F1.1 F2.1 F3.1 F4.1 F5.1 F6.1 F7.1 F8.1 J1.A J1.B J1.C J2.7 J2.8 J2.A J3.1 J3.5 J3.12 J3.15 J3.17 J3.45 J3.48 J3.50 J3.SCREW R23.2 U1.A7 U1.B2 U1.C1 U1.E2 U1.F4 U1.G3 U1.G15 U1.J15 U1.M14 U1.N15 U1.T1 U1.T3 U1.T13 U1.T16 U1.U13 U1.U15 U1.U16 U1.U17 U3.1 U6.A2 U6.A5 U6.B1 U6.B5 U6.C5 Y1.2 Y1.4
copper on no net: | length 535.7
  Top Layer w5: -311.02,1310.26 -309.98,1310.26 -279.98,1340.26 -279.98,1355 ; -185.48,659.06 -185.48,640.22 -128.3,583.03 -73.29,583.03 ; -185.48,678.74 -169.61,662.87 -169.61,638.49 -124.15,593.03 ; -146.11,659.06 -146.11,644.71 -120.93,619.53 v2(-75.6,619.53) ; 607.82,988.01 609.79,989.97
  PWR w50: 695.89,781.11 697,780 767,780
  Bottom Layer w10: -35.2,1082.8 -19.45,1098.55 0.34,1098.55

## Polygon pours and split planes (outlines as drawn)
GND on GND "NONET_L02_P000" (solid, remove dead copper, shelved, pour order 0): -1026.35,1576.89 -1026.35,-236.1 932,-236.1 932,1576.89

## Keep-outs
Keep-Out Layer:
  lines w1: 68.57,1180.06 cw(c-0.33,1180.06) -69.23,1180.06 -551.51,1180.06 ccw(c-551.51,1140.69) -590.88,1140.69 -590.88,179.08 ccw(c-568.24,179.08) -568.24,156.44 -410.76,156.44 cw(c-410.76,136.76) -391.08,136.76 -391.08,-1.04 79.39,-1.04 79.39,113.13 cw(c103.02,113.13) 126.64,113.13 126.64,-1.04 390.42,-1.04 390.42,136.76 cw(c410.1,136.76) 410.1,156.44 567.58,156.44 ccw(c567.58,179.08) 590.22,179.08 590.22,1140.69

## Silkscreen, mask and mechanical layers (free items; w line width, h text height)
Bottom Overlay:
  text "Super Monkey" at -844,1645 h125
  text "RT685 Audio Platorm" at -826.17,1560.5 h75
  text "M" at 1555,1401 h700
  text "W" at -1370,1286 h300
  text "2022-01-06" at 1904,1286 h80
  text "REV C" at 2379,1137 h175
[8] Board Outline:
  lines w2: 79.39,-1.04 79.39,113.13 ; 126.64,-1.04 126.64,113.13 ; 390.42,-1.04 390.42,136.76